# EAGLE board heatedBed (EAGLE 7.0.0)
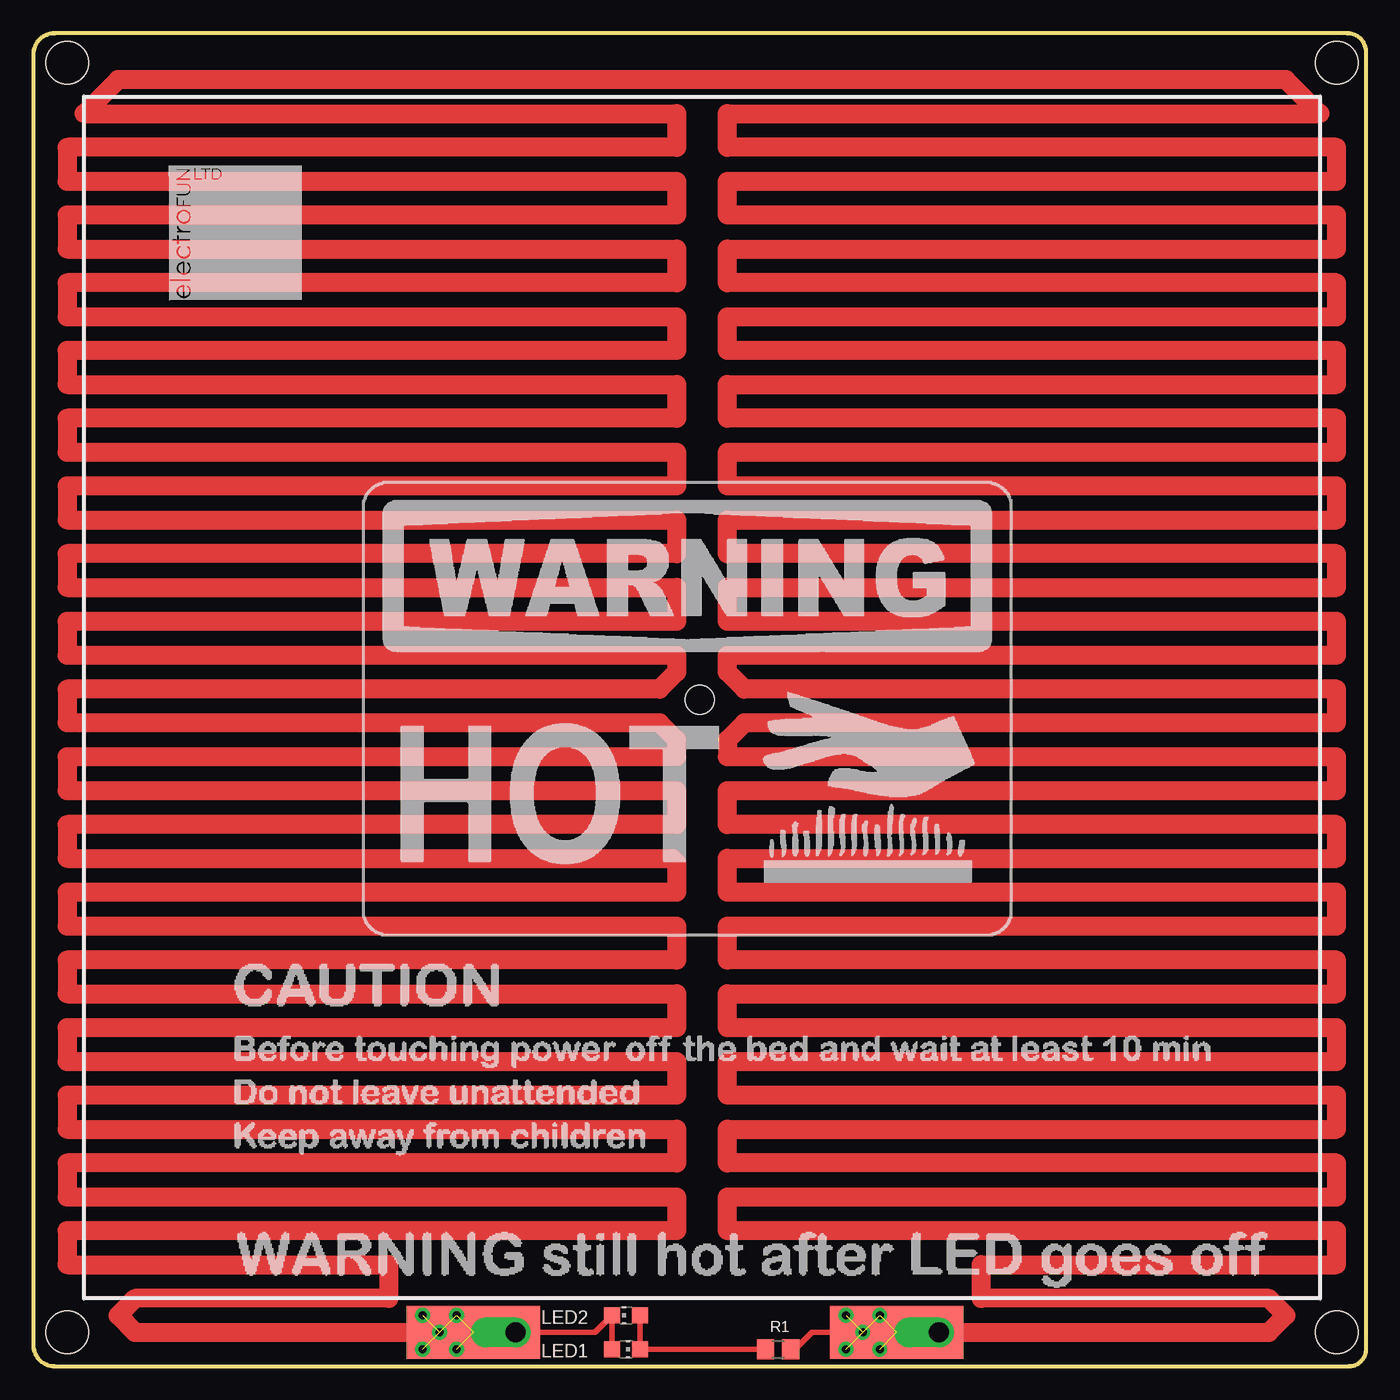
[diagram p0: board, top side]
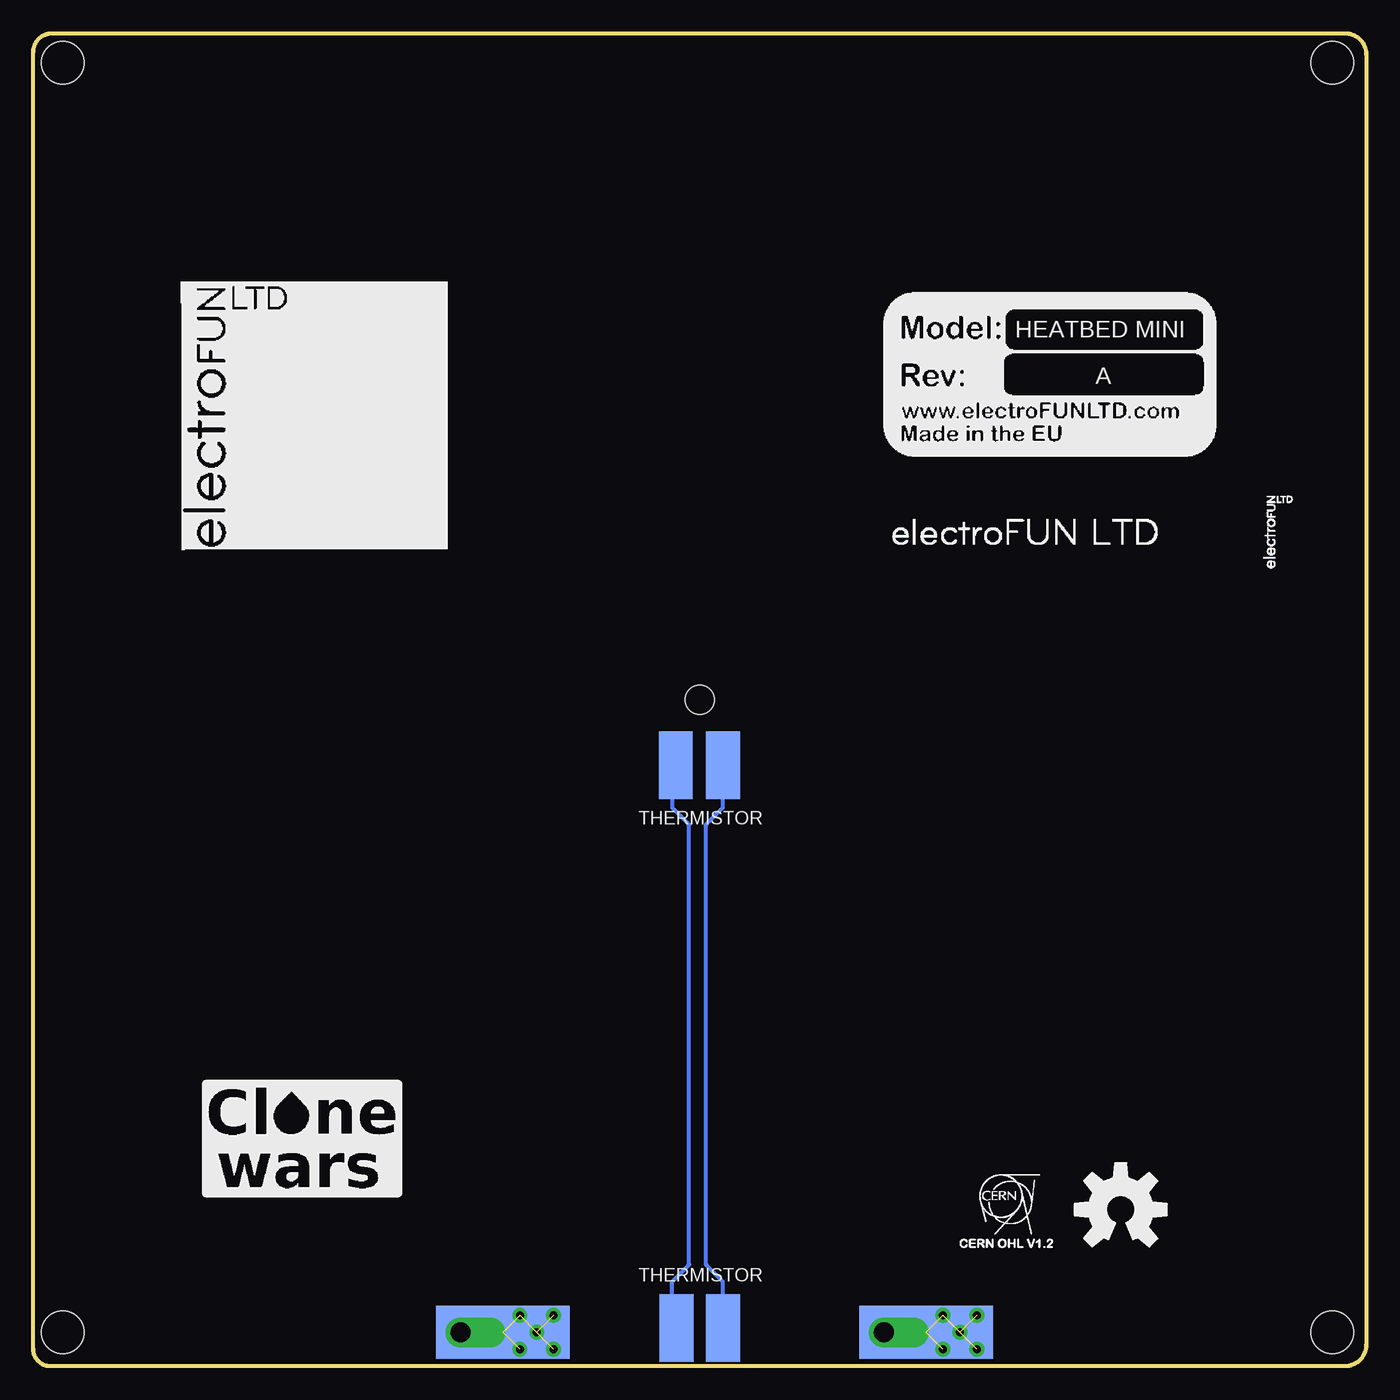
[diagram p1: board, bottom side, seen from below]

Size 100 x 100 mm. Coordinates in mm from the lower left corner, seen from the top.
Outline: 0,98.42 0,1.59 arc90 1.59,0 98.73,0 arc90 100,1.27 100,98.6 arc90 98.6,100 1.58,100 arc90 0,98.42
Copper layers (1*16): Top 0.035mm / dielectric 1.5mm / Bottom 0.035mm
Design rules "myDesignRules": minimum track width 8mil, minimum drill 20mil, track to track 8mil, track to pad 8mil, pad to pad 8mil, via to via 8mil, smd to smd 8mil, copper to edge 10mil, drill to drill 8mil, minimum pad ring 12mil, minimum via ring 10mil, stop-mask expansion 4mil, vias tented up to drill 25mil, thermal gap 10mil
Holes 2.2 mm at 50,50
Holes 3.2 mm at 97.79,2.54 2.54,2.54 2.54,97.79 97.79,97.79

## Footprints (pad centres in the part's own frame; a part is rotated, then mirrored left to right if it is on the bottom)
CHIP-LED0805 = smd 1.2 x 1.2: A 0,-1.05; C 0,1.05
SMD2,54-5,08 = smd 2.54 x 5.08: 1 0,0
R0805 = smd 1.3 x 1.5: 1 -0.95,0; 2 0.95,0
LONG_PAD = smd 10 x 4 bottom: P$1 0,0 | smd 10 x 4: P$2 0,0 | drill 1.5 offset: P$3 3.175,0

## Placement (x,y rotation side)
LED1  [CHIP-LED0805]  44.45,3.81 90 top
LED2  [CHIP-LED0805]  44.45,1.27 270 top
PAD1  [SMD2,54-5,08]  51.8,45.09 0 bottom
PAD2  [SMD2,54-5,08]  48.26,45.09 0 bottom
PAD3  [SMD2,54-5,08]  48.26,2.86 0 bottom
PAD4  [SMD2,54-5,08]  51.75,2.86 0 bottom
R1  2K2  [R0805]  55.88,1.27 0 top
U$1  [CAUTION]  13.97,2.54 0 top
U$2  LONG_PAD  [LONG_PAD]  33.02,2.54 0 top
U$3  LONG_PAD  [LONG_PAD]  64.77,2.54 0 top
U$4  [CERN_OHL]  30.48,8.89 0 bottom
U$5  SPARKFUN_OSHW-LOGOL  [SPARKFUN_OSHW-LOGO-L]  18.41,11.75 0 bottom
U$6  [ELECTROFUN_STRIP]  40.96,59.37 0 bottom
U$7  [CLONE_WARS]  87.31,12.7 0 bottom
U$8  [BOARD_REF]  36.2,68.26 0 bottom
U$10  [WARNING_HOT]  24.13,31.75 0 top
U$11  [ELECTROFUN_20X20]  88.9,61.28 0 bottom
U$12  [ELECTROFUN_10X10]  10.16,80.01 0 top

## Library data of the parts
LED1 LED2 = led
PAD1-PAD4 = wirepad
R1 = rcl
U$1-U$4 U$6-U$8 U$10-U$12 = fmc
U$5 = SAVLibSAV MK-I

## Nets
N$1: LED1.C LED2.A R1.2 U$2.P$1 U$2.P$2 U$2.P$3 U$3.P$1 U$3.P$2 U$3.P$3
N$3: PAD1.1 PAD4.1
N$4: LED1.A LED2.C R1.1
N$5: PAD2.1 PAD3.1

## Tracks (layer width: path | path; a pad name or v marks a point on that pad's centre or on a via)
N$1  (via drill 0.6)  (12 unrouted)
  Top 0.406: R1.2 57.15,1.27 58.42,2.54 U$3.P$2 | LED2.A LED1.C 42.13,2.54 U$2.P$3 U$2.P$2
  Top 1.422: U$3.P$2 U$3.P$3 92.71,2.54 93.98,3.81 92.71,5.08 71.12,5.08 71.12,7.62 97.79,7.62 97.79,10.16 52.07,10.16 52.07,12.7 97.79,12.7 97.79,15.24 52.07,15.24 52.07,17.78 97.79,17.78 97.79,20.32 52.07,20.32 52.07,22.86 97.79,22.86 97.79,25.4 52.07,25.4 52.07,27.94 97.79,27.94 97.79,30.48 52.07,30.48 52.07,33.02 97.79,33.02 97.79,35.56 52.07,35.56 52.07,38.1 97.79,38.1 97.79,40.64 52.07,40.64 52.07,43.18 97.79,43.18 97.79,45.72 52.07,45.72 52.07,46.99 53.34,48.26 97.79,48.26 97.79,50.8 53.34,50.8 52.07,52.07 52.07,53.34 97.79,53.34 97.79,55.88 52.07,55.88 52.07,58.42 97.79,58.42 97.79,60.96 52.07,60.96 52.07,63.5 97.79,63.5 97.79,66.04 52.07,66.04 52.07,68.58 97.79,68.58 97.79,71.12 52.07,71.12 52.07,73.66 97.79,73.66 97.79,76.2 52.07,76.2 52.07,78.74 97.79,78.74 97.79,81.28 52.07,81.28 52.07,83.82 97.79,83.82 97.79,86.36 52.07,86.36 52.07,88.9 97.79,88.9 97.79,91.44 52.07,91.44 52.07,93.98 96.52,93.98 93.98,96.52 6.35,96.52 3.81,93.98 48.26,93.98 48.26,91.44 2.54,91.44 2.54,88.9 48.26,88.9 48.26,86.36 2.54,86.36 2.54,83.82 48.26,83.82 48.26,81.28 2.54,81.28 2.54,78.74 48.26,78.74 48.26,76.2 2.54,76.2 2.54,73.66 48.26,73.66 48.26,71.12 2.54,71.12 2.54,68.58 48.26,68.58 48.26,66.04 2.54,66.04 2.54,63.5 48.26,63.5 48.26,60.96 2.54,60.96 2.54,58.42 48.26,58.42 48.26,55.88 2.54,55.88 2.54,53.34 48.26,53.34 48.26,52.07 46.99,50.8 2.54,50.8 2.54,48.26 46.99,48.26 48.26,46.99 48.26,45.72 2.54,45.72 2.54,43.18 48.26,43.18 48.26,40.64 2.54,40.64 2.54,38.1 47.94,38.1 48.26,37.78 48.26,35.56 2.54,35.56 2.54,33.02 48.26,33.02 48.26,30.48 2.54,30.48 2.54,27.94 48.26,27.94 48.26,25.4 2.54,25.4 2.54,22.86 48.26,22.86 48.26,20.32 2.54,20.32 2.54,17.78 48.26,17.78 48.26,15.24 2.54,15.24 2.54,12.7 48.26,12.7 48.26,10.16 2.54,10.16 2.54,7.62 26.67,7.62 26.67,5.08 7.62,5.08 6.35,3.81 7.62,2.54 U$2.P$2
  other vias: 29.21,3.81 29.21,1.27 30.48,2.54 31.75,3.81 31.75,1.27 60.96,3.81 63.5,3.81 62.23,2.54 60.96,1.27 63.5,1.27
N$3
  Bottom 0.254: 51.8,45.45 PAD1.1
  Bottom 0.305: PAD4.1 52.07,2.54 52.07,6.35 50.8,7.62 50.8,40.64 52.07,41.91 52.07,44.81 PAD1.1
N$4
  Top 0.406: R1.1 LED2.C LED1.A
N$5
  Bottom 0.305: PAD3.1 48.26,6.35 49.53,7.62 49.53,40.64 48.26,41.91 PAD2.1

## Text on the board
bPlace: HEATBED MINI | A | THERMISTOR | THERMISTOR